# EAGLE board EEPROM AT28C16 Helper (EAGLE 7.6.0)

Size 35 x 35 mm. Coordinates in mm from the lower left corner, seen from the top.
Outline: 0,0 35,0 35,35 0,35 0,0
Copper layers (1*16): Top 0.035mm / dielectric 1.5mm / Bottom 0.035mm
Design rules "default": minimum track width 10mil, minimum drill 24mil, track to track 8mil, track to pad 8mil, pad to pad 8mil, via to via 8mil, smd to smd 8mil, copper to edge 40mil, drill to drill 8mil, minimum pad ring 10mil, minimum via ring 8mil, stop-mask expansion 4mil, vias tented up to drill 0mil, thermal gap 10mil

## Footprints (pad centres in the part's own frame; a part is rotated, then mirrored left to right if it is on the bottom)
DIL24-6 = drill 0.813 long: 1 -13.97,-7.62; 2 -11.43,-7.62; 3 -8.89,-7.62; 4 -6.35,-7.62; 5 -3.81,-7.62; 6 -1.27,-7.62; 7 1.27,-7.62; 8 3.81,-7.62; 9 6.35,-7.62; 10 8.89,-7.62; 11 11.43,-7.62; 12 13.97,-7.62; 13 13.97,7.62; 14 11.43,7.62; 15 8.89,7.62; 16 6.35,7.62; 17 3.81,7.62; 18 1.27,7.62; 19 -1.27,7.62; 20 -3.81,7.62; 21 -6.35,7.62; 22 -8.89,7.62; 23 -11.43,7.62; 24 -13.97,7.62
1X11 = drill 1.016 long: 1 -12.7,0; 2 -10.16,0; 3 -7.62,0; 4 -5.08,0; 5 -2.54,0; 6 0,0; 7 2.54,0; 8 5.08,0; 9 7.62,0; 10 10.16,0; 11 12.7,0
SOLDERJUMPER_REFLOW = smd 1.168 x 1.6: 1 -0.762,0; 2 0.762,0
1X10-BIG = drill 1.016 pad 1.778 octagon: 1 -11.43,0; 2 -8.89,0; 3 -6.35,0; 4 -3.81,0; 5 -1.27,0; 6 1.27,0; 7 3.81,0; 8 6.35,0; 9 8.89,0; 10 11.43,0
1X03 = drill 1.016: 1 -2.54,0; 2 0,0; 3 2.54,0
R1206 = smd 1.6 x 1.803: 1 -1.422,0; 2 1.422,0

## Placement (x,y rotation side)
28C16A_EEPROM  28C16AP  [DIL24-6]  17,19.5 270 top
ADDRESS  [1X11]  2,19.5 90 top
CHIP_ENABLE_TO_GND  [SOLDERJUMPER_REFLOW]  27.5,4.5 270 top
DATA  PINHD-1X10  [1X10-BIG]  33,17 90 top
ENABLE  [1X03]  17,1.5 0 top
R_PUP_2K  [R1206]  31.5,32 0 top

## Library data of the parts
28C16A_EEPROM = microchip; MPN: CAT28C16ALI-12; OC_FARNELL: 1718292; OC_NEWARK: 06R0648
ADDRESS = pinhead
CHIP_ENABLE_TO_GND = microbuilder
DATA ENABLE R_PUP_2K = adafruit

## Nets
A0: 28C16A_EEPROM.8 ADDRESS.1
A1: 28C16A_EEPROM.7 ADDRESS.2
A2: 28C16A_EEPROM.6 ADDRESS.3
A3: 28C16A_EEPROM.5 ADDRESS.4
A4: 28C16A_EEPROM.4 ADDRESS.5
A5: 28C16A_EEPROM.3 ADDRESS.6
A6: 28C16A_EEPROM.2 ADDRESS.7
A7: 28C16A_EEPROM.1 ADDRESS.8
A8: 28C16A_EEPROM.23 ADDRESS.9
A9: 28C16A_EEPROM.22 ADDRESS.10
A10: 28C16A_EEPROM.19 ADDRESS.11
CHIP_ENABLE: 28C16A_EEPROM.18 CHIP_ENABLE_TO_GND.2 ENABLE.3
D0: 28C16A_EEPROM.9 DATA.1
D1: 28C16A_EEPROM.10 DATA.2
D2: 28C16A_EEPROM.11 DATA.3
D3: 28C16A_EEPROM.13 DATA.4
D4: 28C16A_EEPROM.14 DATA.5
D5: 28C16A_EEPROM.15 DATA.6
D6: 28C16A_EEPROM.16 DATA.7
D7: 28C16A_EEPROM.17 DATA.8
GND: 28C16A_EEPROM.12 CHIP_ENABLE_TO_GND.1 DATA.10
OUT_ENABLE: 28C16A_EEPROM.20 ENABLE.2
VCC: 28C16A_EEPROM.24 DATA.9 R_PUP_2K.1
WRITE_ENABLE: 28C16A_EEPROM.21 ENABLE.1 R_PUP_2K.2

## Tracks (layer width: path | path; a pad name or v marks a point on that pad's centre or on a via)
A0  (1 unrouted)
A1  (1 unrouted)
A2  (1 unrouted)
A3  (1 unrouted)
A4  (1 unrouted)
A5  (1 unrouted)
A6  (1 unrouted)
A7  (1 unrouted)
A8  (1 unrouted)
A9  (1 unrouted)
A10  (1 unrouted)
CHIP_ENABLE  (2 unrouted)
D0  (1 unrouted)
D1  (1 unrouted)
D2  (1 unrouted)
D3  (1 unrouted)
D4  (1 unrouted)
D5  (1 unrouted)
D6  (1 unrouted)
D7  (1 unrouted)
GND  (2 unrouted)
OUT_ENABLE  (1 unrouted)
VCC  (2 unrouted)
WRITE_ENABLE  (2 unrouted)

## Text on the board
tNames: A10 | GND | VCC | D7 | A0 | D0 | OUT ENABLE | WRITE ENABLE | CHIP ENABLE
bNames: PCBv1 2017.08 | MadeInTheUSB.net